# Altium PCB PCB1.PcbDoc
Units mil, origin at the board's own origin, x right, y up, seen from the top; angles counter-clockwise.
Board outline 2705 x 3180 mil, 2 copper layers (Top Layer, Bottom Layer); 7 components, 75 nets, 138 pads, 8 vias.
Unrouted connection lines stored in the file: 10.
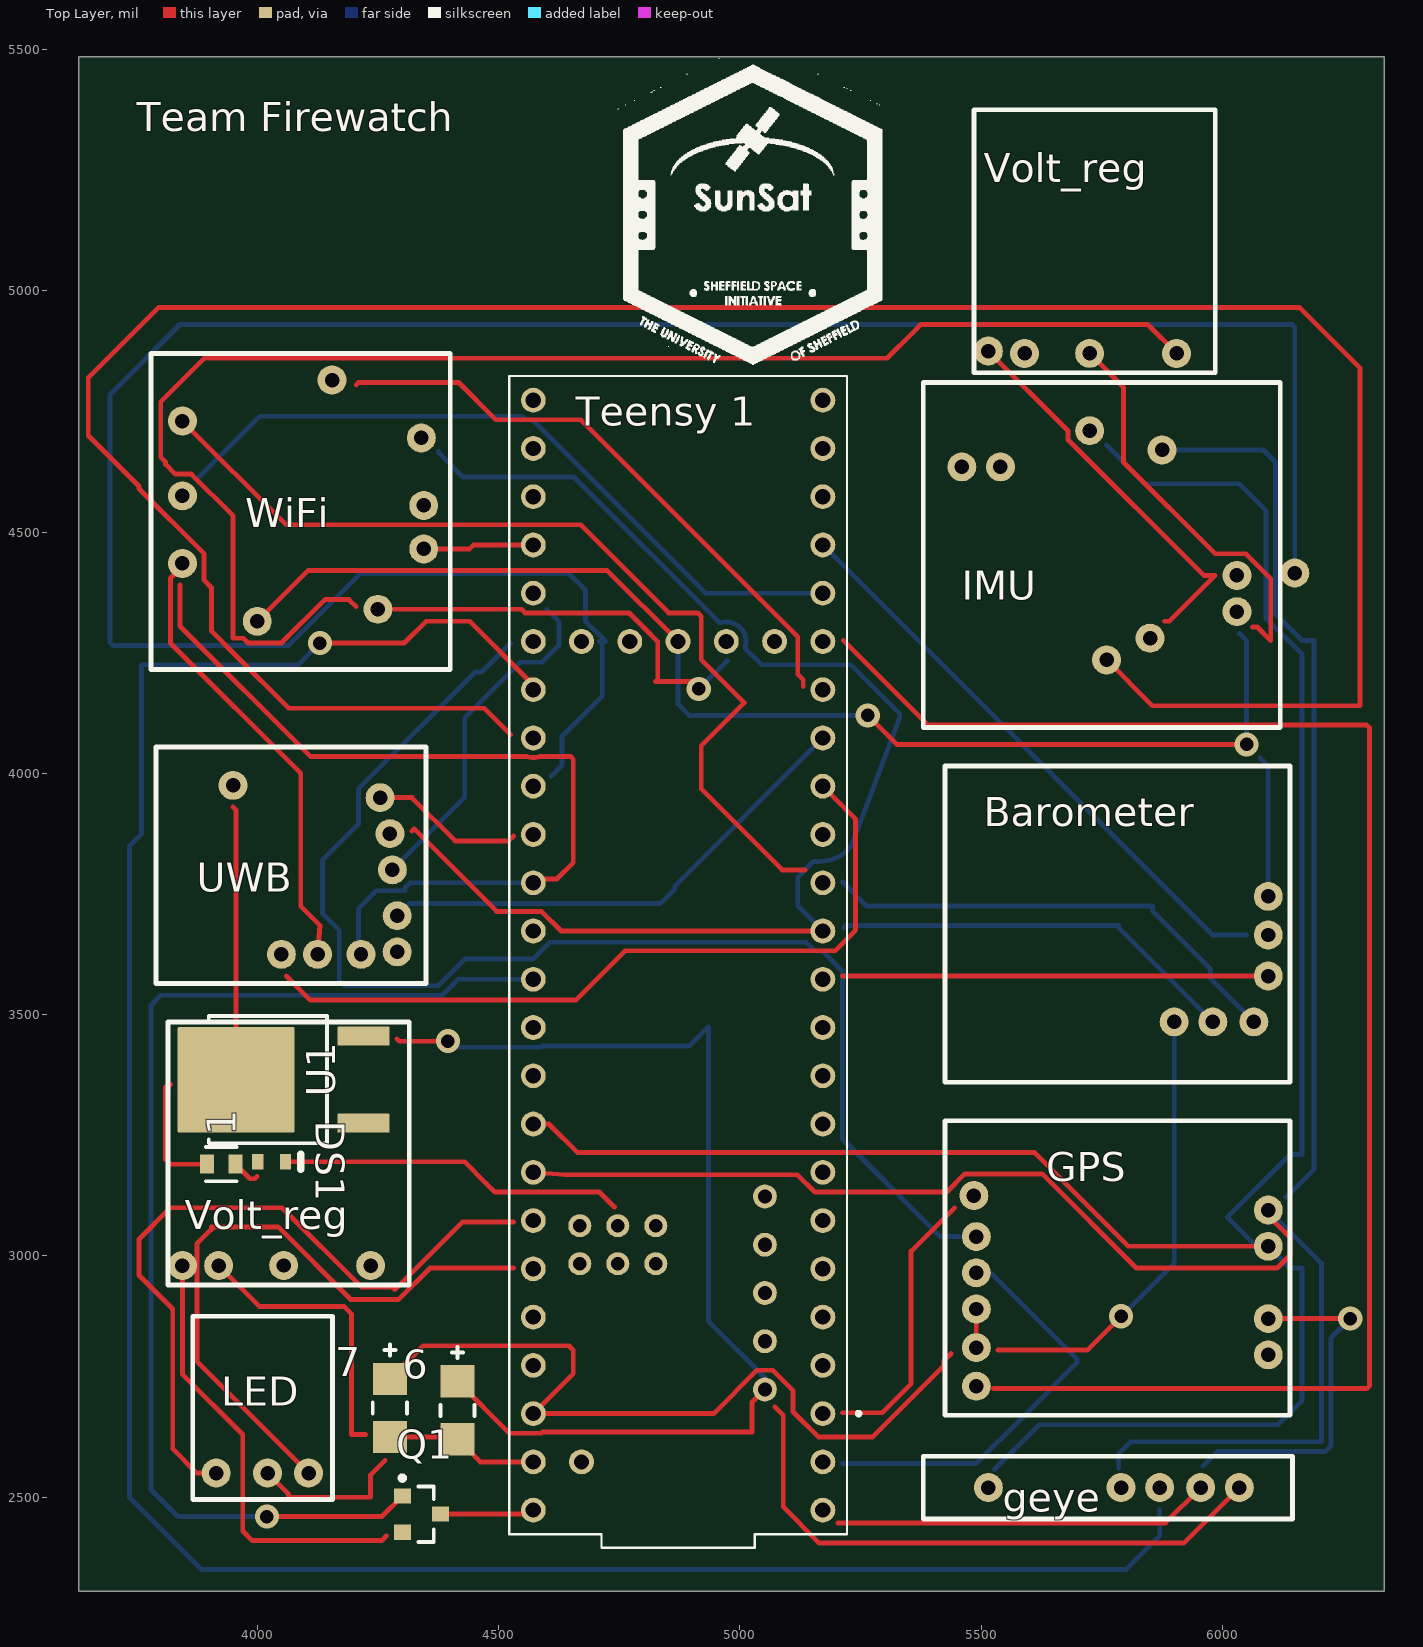
[diagram p0: Top Layer view]
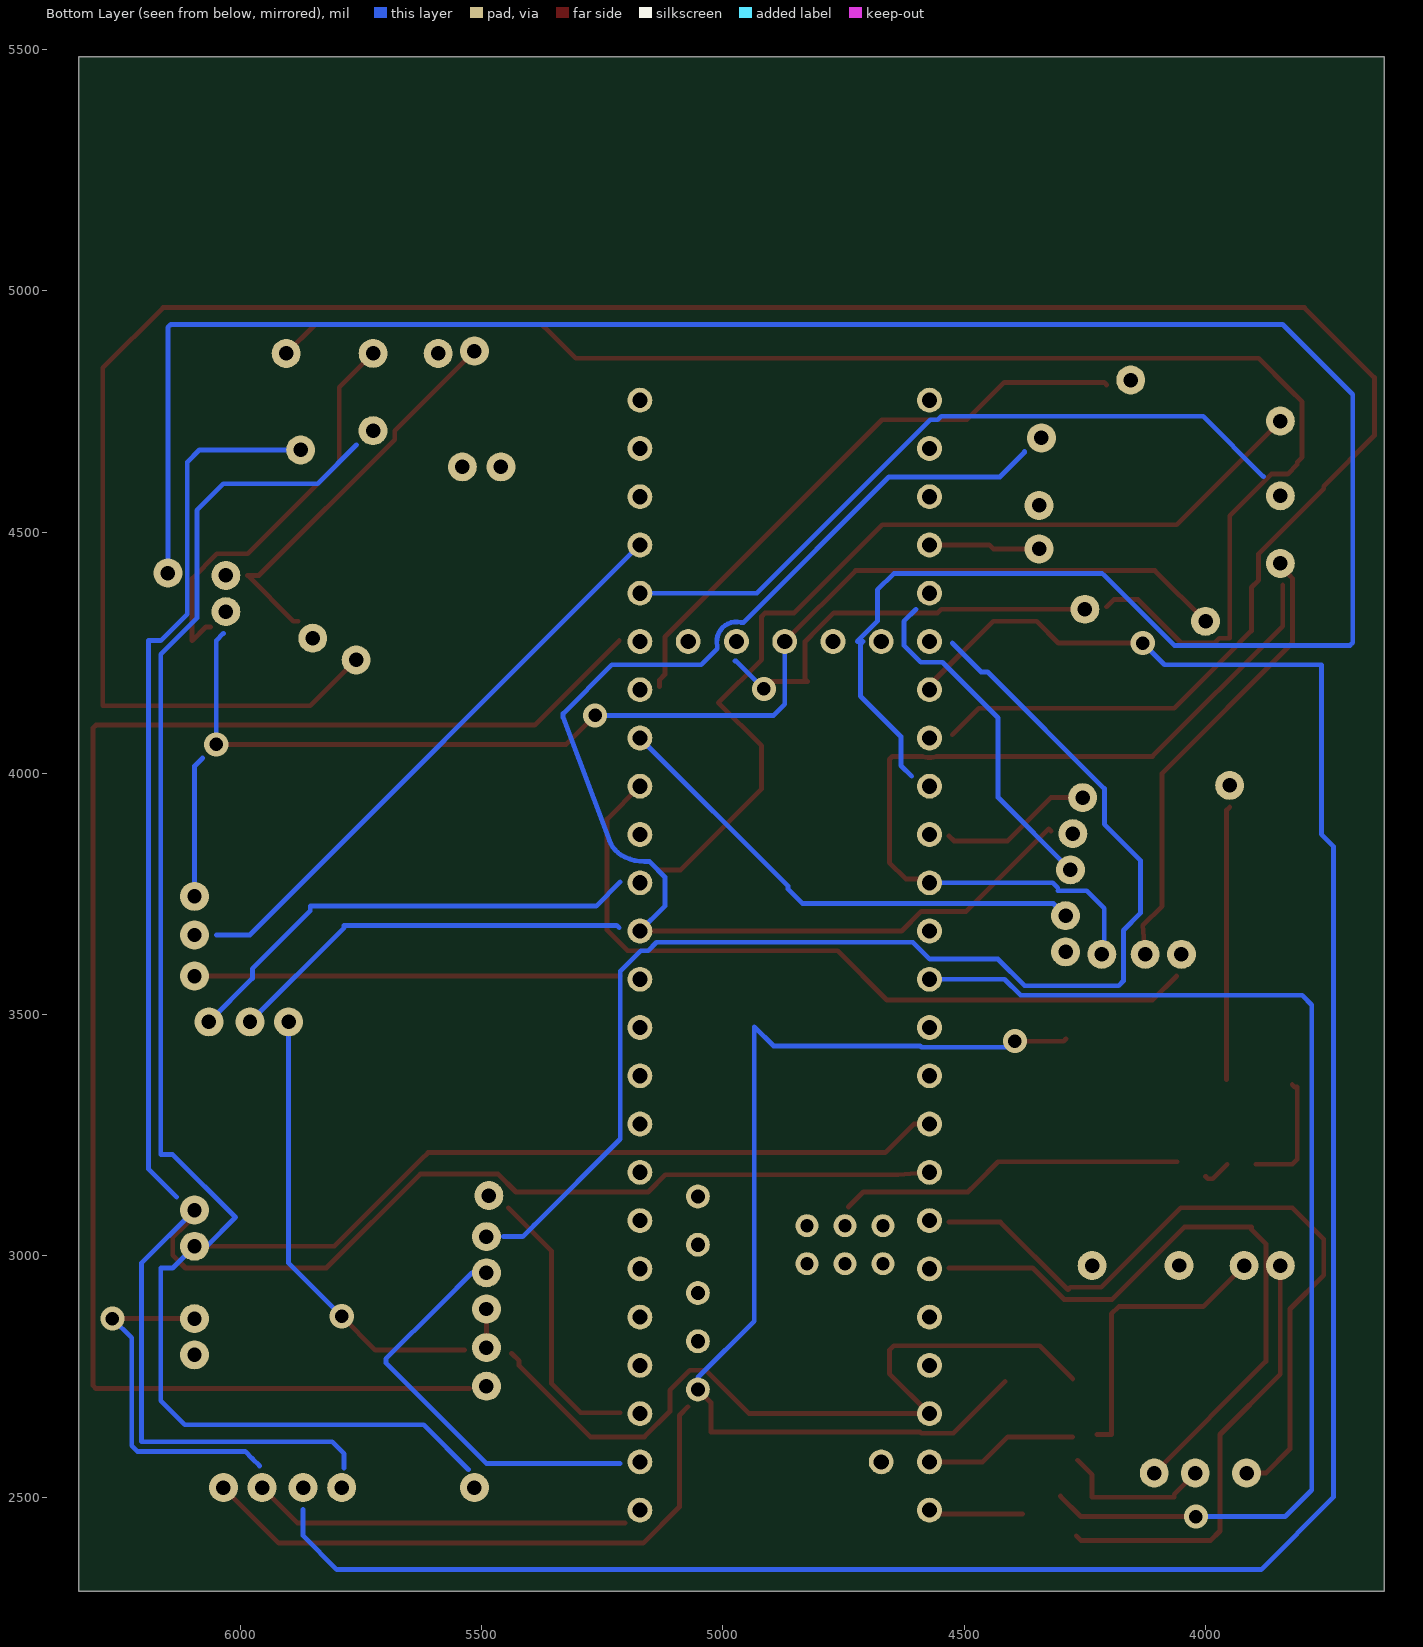
[diagram p1: Bottom Layer view, seen from below]
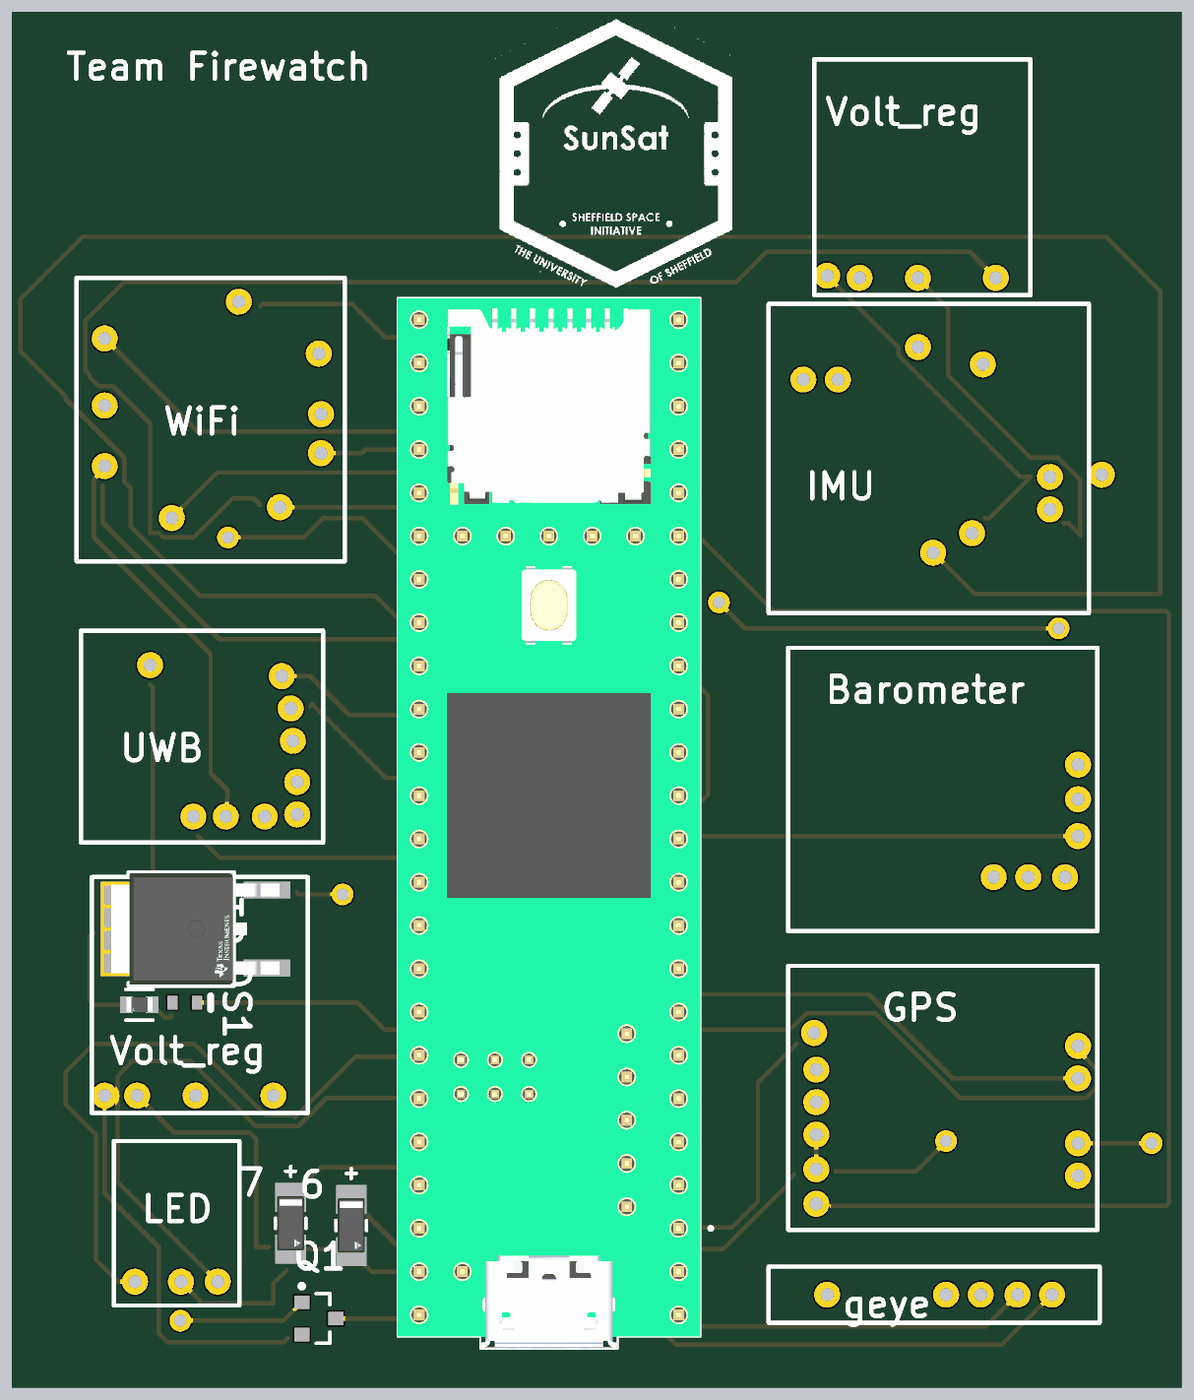
[diagram p2: 3D render of the assembled board from above, using the file's embedded part models]

## Layer stack, top to bottom
Top Solder: solder mask 0.4, Solder Resist, Dk 3.5
Top Layer: signal copper 1.4
Dielectric 1: dielectric 12.6, FR-4, Dk 4.8
Bottom Layer: signal copper 1.4
Bottom Solder: solder mask 0.4, Solder Resist, Dk 3.5

## Board outline
3630,2305 6335,2305 6335,5485 3630,5485

## Design rules (kind name [scope] priority, off if disabled: settings)
Clearance [All] p1: gap=10 ignorepadtopadclearanceinfootprint=FALSE
PolygonConnect [All] p1: connectstyle=Relief reliefconductorwidth=10 reliefentries=4 polygonreliefangle="90 Angle" airgapwidth=10
RoutingVias [All] p1: holewidth=28 width=50 viastyle="Through Hole" minholewidth=28 minwidth=50 maxholewidth=28 maxwidth=50
SolderMaskExpansion [All] p1: expansion=4 istentingtop=FALSE
SupplyNets "Schematic Supply Nets_10" [InNet('+5')] p1: voltage=0.000
SupplyNets "Schematic Supply Nets_9" [InNet('VDD')] p2: voltage=0.000
SupplyNets "Schematic Supply Nets_8" [InNet('VCC 3.3V')] p3: voltage=0.000
SupplyNets "Schematic Supply Nets_7" [InNet('GND')] p4: voltage=0.000
SupplyNets "Schematic Supply Nets_6" [InNet('1.25V')] p5: voltage=0.000
SupplyNets "Schematic Supply Nets_5" [InNet('3.3V')] p6: voltage=0.000
SupplyNets "Schematic Supply Nets_4" [InNet('AVDD 1.8V')] p7: voltage=0.000
SupplyNets "Schematic Supply Nets_3" [InNet('VDDIO 1.8V')] p8: voltage=0.000
SupplyNets "Schematic Supply Nets_2" [InNet('VCC')] p9: voltage=0.000
SupplyNets "Schematic Supply Nets_1" [InNet('antenna')] p10: voltage=0.000
SupplyNets "Schematic Supply Nets" [InNet('+1.25')] p11: voltage=0.000
Width [All] p1: maxlimit=10 minlimit=10 preferedwidth=10
30 further rules are at their usual default settings.

## Classes and differential pairs
component class ALL: 6 7 Q1 "Teensy 1"

## Components (designator, comment, footprint, x,y, rotation, side; value= is the part's Value field where it differs from the comment)
1 "CRCW0603220RFKEA" FP-CRCW0603-e3-MFG 3925.47,3190 r180 top
6 "293D105X0016A2TE3" FP-293DA-MFG 4415,2680 r90 top
7 "293D105X0016A2TE3" FP-293DA-MFG 4275,2685 r90 top
DS1 "TLMS1000-GS08" VISH-TLMS1000_V 4030,3195 r0 top
Q1 "MMBTA42LT1G" ONSC-SOT-23-3-318-08_V 4340,2465 r0 top
"Teensy 1" "Teensy 4.1" MODULE_DEV-16771 4872.01,3623.23 r90 top
U1 "LM317MKVURG3" FP-KVU0003A-MFG 4022.17,3365.16 r90 top

## Footprints (in the part's own frame and the unit in brackets; to place one, negate y for a bottom-side part, rotate by r counter-clockwise, add the part's x,y. Pads: shape width x height; smd on the part's side, far side on the other; paste and mask are expansions set on the pad)
FP-293DA-MFG [mm]
  rect 1.7x1.8 smd paste+0 mask+0: 1(-1.525,0) 2(1.525,0)
  silkscreen extent -0.3,-0.9 3.35,0.9, body extent -2.47,-1 2.47,1, height 0.25
FP-CRCW0603-e3-MFG [mm]
  rect 0.75x1 smd paste+0 mask+0: 1(-0.75,0) 2(0.75,0)
  silkscreen extent -0.8,-0.9 0.8,0.9, body extent -1.22,-0.6 1.22,0.6, height 0.25
FP-KVU0003A-MFG [mm]
  rrect10% 1x2.75 smd paste+0 mask+0: 1(-2.29,-5.025) 3(2.29,-5.025)
  rrect2% 5.55x6.15 smd paste-1000 mask+0: 4(0,1.675)
  silkscreen extent -3.35,-3.11 3.35,3.11, body extent -3.45,-6.5 3.45,4.85, height 0.25
MODULE_DEV-16771 [mm]
  round 1.308 hole 0.8: 0(-26.67,-7.62) 1(-24.13,-7.62) 2(-21.59,-7.62) 3(-19.05,-7.62) 3.3V_1(6.35,-7.62) 3.3V_2(-24.13,7.62) 3.3V_3(16.51,-2.54) 4(-16.51,-7.62) 5(-13.97,-7.62) 6(-11.43,-7.62) 7(-8.89,-7.62) 8(-6.35,-7.62) 9(-3.81,-7.62) 10(-1.27,-7.62) 11(1.27,-7.62) 12(3.81,-7.62) 13(3.81,7.62) 14(1.27,7.62) 15(-1.27,7.62) 16(-3.81,7.62) 17(-6.35,7.62) 18(-8.89,7.62) 19(-11.43,7.62) 20(-13.97,7.62) 21(-16.51,7.62) 22(-19.05,7.62) 23(-21.59,7.62) 24(8.89,-7.62) 25(11.43,-7.62) 26(13.97,-7.62) 27(16.51,-7.62) 28(19.05,-7.62) 29(21.59,-7.62) 30(24.13,-7.62) 31(26.67,-7.62) 32(29.21,-7.62) 33(29.21,7.62) 34(26.67,7.62) 35(24.13,7.62) 36(21.59,7.62) 37(19.05,7.62) 38(16.51,7.62) 39(13.97,7.62) 40(11.43,7.62) 41(8.89,7.62) GND1(-29.21,-7.62) GND2(6.35,7.62) GND3(-26.67,7.62) GND4(16.51,0) ON/OFF(16.51,5.08) PROGRAM(16.51,2.54) VBAT(16.51,-5.08) VIN(-29.21,7.62) VUSB(-26.67,5.08)
  round 1.258 hole 0.75: 5V(-22.86,-4.57) D+(-17.78,-4.57) D-(-20.32,-4.57) USB_GND1(-15.24,-4.57) USB_GND2(-12.7,-4.57)
  round 1.208 hole 0.7: GND5(-14.24,3.17) LED(-16.24,3.17) R+(-16.24,5.17) R-(-14.24,5.17) T+(-14.24,1.17) T-(-16.24,1.17)
  silkscreen extent -31.18,-9.6 30.48,8.89, body extent -31.18,-8.89 30.48,8.89, height 7.15
ONSC-SOT-23-3-318-08_V [mm] "SOT23, 3-Leads, Body 2.92x1.3mm, Pitch 0.95mm"
  rect 0.9x0.8 smd: 1(-1,0.95) 2(-1,-0.95) 3(1,0)
  silkscreen extent -1.12,-1.46 0.65,2.02, body extent -0.65,-1.46 0.65,1.46, height 1.11
VISH-TLMS1000_V [mm] "SMD, 2-Leads, Body 0.8x1.6mm"
  rect 0.6x0.8 smd: 1(-0.725,0) 2(0.725,0)
  silkscreen extent 1.52,-0.4 1.52,0.4, body extent -0.8,-0.4 0.8,0.4, height 0.65

## Part data
1: library part CMP-2000-03085-2, "RES Thick Film, 220Ω, 1%, 0.1W, 100ppm/°C, 0603", Case Code (Imperial)=0603, Case Code (Metric)=1608, Max Operating Temperature=155°C, Max Power Dissipation=100mW, Min Operating Temperature=-55°C, Package Quantity=10, Resistance=220R, Temperature Coefficient=100ppm/°C, Tolerance=1%, Voltage Rating=75V, Case/Package=0603, Composition="Thick Film", Contact Plating=Tin, Depth=0.85mm, Features="Automotive AEC-Q200", Height=0.45mm, Lead Free="Lead Free", Length=1.55mm, Military Standard=Not, Number of Terminations=2, Packaging="Tape and Reel", Power Rating=100mW, Radiation Hardening=No, Termination=SMD/SMT, Voltage Rating (DC)=75V, Weight=7.1E-05oz, Width=0.033inch
6 7: library part CMP-00030-40940187-1, "293D105X0016A2TE3 Surface Mount Tantalum Capacitor, 1 uF, 16 V, ± 20%, -55 °C, 125 °C, 1206 [3216-18 Metric]", Capacitance=1µF, Case Code (Imperial)=1206, Case Code (Metric)=3216, Dielectric Material=Tantalum, ESR (Equivalent Series Resistance)=9.3Ω, Leakage Current=500nA, Max Operating Temperature=125°C, Min Operating Temperature=-55°C, Ripple Current=90mA, Tolerance=20%, Voltage Rating=16V, Case/Package=1206, Depth=1.6mm, Dissipation Factor=4%, Features="General Purpose", Height=1.8mm, Height - Seated (Max)=1.8034mm, Lead Free="Lead Free", Length=3.2mm, Mount="PCB, Surface Mount", NexarPartId=40940187, Number of Pins=2, Packaging="Tape and Reel", Polarity=Polar, Radiation Hardening=No, REACH SVHC=Unknown, RoHS=Compliant, Schedule B="8532210050, 8532210050", Termination=SMD/SMT, Voltage Rating (DC)=16V, Width=1.6002mm
DS1: library part CMP-2000-07254-1, "Low Current LED, 40 mW, 1.8 V, -40 to 100 degC, 2-Pin SMD (0603), RoHS, Tape and Reel", Forward Current If=2mA, Forward Voltage=1.8V, LED Colour=Red, Manufacturer=Vishay, Package Description="2-Pin Surface Mount Device, Body 1.6 x 0.8 mm", Package Reference=TLMS1000, Automotive Qualification Standard=AEC-Q100, Bulb Size=1.6mmx0.8mm, Datasheet URL=https://datasheet.ciiva.com/5798/1698881-5798337.pdf, Datasheet Version="Rev. 1.7, 02/2011", LED Mounting=SMD, Lens Shape=Rectangular, Luminous Intensity=4mcd, Manufacturer URL=http://www.vishay.com/, Mounting Technology=SurfaceMount, MSL=MSL2-1year, Packaging=CutTape, Product Range=-, SVHC=ToBeAdvised, Viewing Angle=80°, Wavelength Typ=636nm
Q1: library part CMP-1048-00662-1, "High Voltage Transistor, NPN Silicon, 3-Pin SOT-23, Pb-Free, Tape and Reel", Manufacturer="On Semiconductor", ComponentLink1Description="Manufacturer URL", ComponentLink1URL=http://www.onsemi.com/, ComponentLink2Description=Datasheet, ComponentLink2URL=http://www.onsemi.cn/pub_link/Collateral/MMBTA42LT1-D.PDF, ComponentLink3Description="Package Specification", ComponentLink3URL=http://www.onsemi.cn/pub_link/Collateral/318-08.PDF, DatasheetVersion="Rev. 12", fT Min (MHz)=50, IC Continuous (A)=0.5, Mounting Technology="Surface Mount", PackageDescription="3-Pin Small Outline Transistor, Body 2.92 x 1.3 mm, Pitch 0.95 mm", PackageReference=SOT-23-3-318-08, PackageVersion="Rev. AP, 11/2009", Packing="Tape and Reel", PartNumber=MMBTA42LT1G, Polarity=NPN, RoHS=TRUE
"Teensy 1": library part CMP-003-000000-1, "RT1062 Teensy 4.1 series ARMÂ® CortexÂ®-M7 MPU Embedded Evaluation Board", Package=None, Availability="In Stock", Check_prices=https://www.snapeda.com/parts/DEV-16771/SparkFun+Electronics/view-part/?ref=eda, Component Type=Standard, Design Item ID=DEV-16771, MF="SparkFun Electronics", MP=DEV-16771, Pin Count=65, Price=None, Purchase-URL=https://pricing.snapeda.com/search/part/DEV-16771/?ref=eda, SnapEDA_Link=https://www.snapeda.com/parts/DEV-16771/SparkFun+Electronics/view-part/?ref=snap, Source=DEV-16771.SchLib
U1: library part CMP-04917-000136-1, "IC REG LIN POS ADJ 500MA TO252-3", Case/Package=TO-252-3, Dropout Voltage=2V, Max Input Voltage=40V, Max Operating Temperature=125°C, Max Output Current=500mA, Max Output Voltage=37V, Min Input Voltage=4.2V, Min Operating Temperature=-40°C, Min Output Voltage=1.25V, Package Quantity=2500, Power Supply Rejection Ratio (PSRR)=80dB, Quiescent Current=3.5mA, Reference Voltage=1.3V, Contact Plating=Tin, Height=2.39mm, Lead Free="Lead Free", Length=6.7mm, Min Current Limit=500mA, Mount="Surface Mount", Number of Outputs=1, Number of Pins=3, Number of Regulators=1, Output Current=500mA, Output Type=Adjustable, Output Voltage=37V, Packaging="Tape and Reel", Polarity=Positive, Radiation Hardening=No, REACH SVHC="No SVHC", RoHS Compliant=Yes, Weight=0.011598oz, Width=6.22mm

## Free pads (board coordinates)
  round 60 hole 30: 2(6035,2520) 3(5515,2520) 4(5790,2520) 5(5870,2520) 6(5955,2520) 7(5900,3485) 8(6095,3745) 9(6065,3485) 10(6095,3580) 11(6095,3665) 12(5980,3485) 13(6030,4335) 14(5850,4280) 15(6030,4410) 16(5540,4635) 17(5460,4635) 18(5725,4710) 19(5875,4670) 20(3845,4730) 21(4250,4340) 22(3845,4435) 23(4340,4695) 24(4345,4555) 25(4155,4815) 26(4345,4465) 27(3845,4575) 28(4000,4315) 29(3920,2980) 29(5590,4870) 30(4054.84,2980.16) 30(5724.84,4870.16) 31(4235,2980) 31(5905,4870) 32(4106.3,2550) 33(4021.3,2550) 34(3915,2550) 35(4050,3625) 36(4125,3625) 37(4215,3625) 38(4290,3705) 39(4280,3800) 40(4275,3875) 41(4254.63,3949.63) 43(3950,3975) 44(4290,3630) 45(6095,2870) 46(6095,2795) 47(6095,3020) 48(6095,3095) 49(5490,2965) 50(5490,2810) 51(5490,2730) 52(5490,2890) 53(5490,3040) 54(5485,3125) 59(6150,4415) 60(5760,4235) 61(3845,2980) 61(5515,4875)

## Via types
v1: diameter 50, hole 28, Top Layer to Bottom Layer, 8 vias

## Nets (pads, with @x,y where several pads share a name; then routed paths per layer and width w, separated by ;. In a path a pad name is that pad's centre, name@x,y a point inside that pad or via, vN(x,y) a via of type N, cw(c..) or ccw(c..) an arc to the next point about the centre after c; other vN are vias at no path point)
1.25V: 
3.3V: 7.2 "Teensy 1.3.3V_2" | length 1641.7
  Top Layer w10: 7.2 4343.94,2813.98 4646.02,2813.98 4655,2805 4655,2756.22 4572.01,2673.23 4945.69,2673.23 5035.46,2762.99 5068.4,2762.99 5110,2721.39 5110,2677.61 5162.61,2625 5275,2625 5422.48,2772.48 5422.48,2782.48 5437.85,2797.85
+1.25: 
+5: 6.2 "Teensy 1.5V" | length 2225.9
  Top Layer w10: 4289.13,3450 4294.13,3445 v1(4395,3445) ; 6.2 4522.56,2632.48 4588.89,2632.48 4591.41,2635 5025,2635 5025,2696.3 5051.93,2723.23
  Bottom Layer w10: v1(4395,3445) 4407.52,3432.48 4588.89,3432.48 4591.41,3435 4895,3435 4935,3475 4935,2865 5051.93,2748.07 5051.93,2723.23
antenna: 
"AVDD 1.8V": 
GND: 6.1 7.1 "Teensy 1.GND1" "Teensy 1.GND2" "Teensy 1.GND3" "Teensy 1.GND4" "Teensy 1.GND5" "Teensy 1.USB_GND1" "Teensy 1.USB_GND2" pad.28 | length 2873.5
  Top Layer w10: pad.28 4105,4420 4725.24,4420 4872.01,4273.23 ; 7.1 4410,2624.96 6.1 4461.73,2573.23 4572.01,2573.23 ; v1(5265,4120) 5325,4060 v1(6050,4060)
  Bottom Layer w10: 4872.01,4273.23 4872.01,4142.99 4895,4120 v1(5265,4120) ; 6035,4290 6050,4275 v1(6050,4060)
Net1_1: 
Net1_2: Q1.2
Net2_1: 
Net3_1: 
Net5_2: 
Net*1_C1: 
Net*1_C3: "Teensy 1.11" "Teensy 1.18" | length 2701.2
  Top Layer w10: 4320,3880 4325,3885 4496.02,3713.98 4588.89,3713.98 4629.63,3673.23 5172.01,3673.23
  Bottom Layer w10: 4375.29,4667.08 cw(c4340,4695) 4375.09,4666.83 4375.09,4664.91 4426.02,4613.98 4656.02,4613.98 4957.16,4312.84 4961.31,4312.84 4962.43,4312.84 cw(c4972.01,4273.23) 5011.61,4263.65 5011.61,4262.53 5011.61,4258.39 5045,4225 5230,4225 5331.33,4123.67 5331.33,4115.35 5235,3860 cw(c5180.54,3880.42) 5210.97,3830.86 cw(c5162.98,3909.01) 5162.98,3817.3 5152.3,3817.3 5149.57,3814.57 5120,3785 5120,3725.24 5122.93,3722.31 5172.01,3673.23
Net*1_C4: "Teensy 1.37"
Net*1_D1: 
Net*1_D2: "Teensy 1.13" | length 1599.9
  Top Layer w10: 3840,4390.28 3840,4305 4110,4035 4557.9,4035 ccw(c4572.01,4073.23) 4586.11,4035 4649.14,4035 4652.07,4032.07 4655,4029.14 4655,3815 4621.17,3781.17 4579.95,3781.17 4572.01,3773.23
  Bottom Layer w10: 4306.14,3762.5 4316.87,3773.23 4572.01,3773.23
Net*1_D4: 
Net*1_E2: "Teensy 1.24" | length 1587.2
  Top Layer w10: 4060,3580 4110,3530 4660,3530 4762.48,3632.48 5197.48,3632.48 5240,3675 5240,3905.24 5172.01,3973.23
Net*_1: 
Net*_7: 
Net*_8: 
Net*_16: 
Net*_17: 
Net*_19: "Teensy 1.26"
Net*_20: 
Net*_21: 
Net*_22: "Teensy 1.8"
Net*_23: "Teensy 1.7"
Net*_27: "Teensy 1.28" | length 1495.7
  Bottom Layer w10: 3880,4615 4005,4740 4547.61,4740 4555.13,4732.48 4570.38,4732.48 4929.63,4373.23 5172.01,4373.23
Net*_32: "Teensy 1.36" pad.26 | length 230.4
  Top Layer w10: pad.26 4440,4465 4448.23,4473.23 4572.01,4473.23
Net*_36: "Teensy 1.12"
NetB1_3: "Teensy 1.19" | length 65.1
  Top Layer w10: 4572.01,3173.23 4636.96,3168.36
NetB1_4: "Teensy 1.1" "Teensy 1.39" | length 4935.2
  Top Layer w10: v1@4125,4270 v1(4130,4270) 4305,4270 4350,4315 4440,4315 4572.01,4182.99 4572.01,4173.23
  Bottom Layer w10: v1(4130,4270) 4085,4225 3760,4225 3760,3873.64 3735,3848.64 3735,2500 3885,2350 5800,2350 5870,2420 5870,2475
NetB1_10: 
NetB2_5: 
NetB2_10: 
NetB3_2: 
NetB3_3: 
NetB3_4: "Teensy 1.40"
NetB3_9: 
NetB3_17: "Teensy 1.41"
NetB4_3: "Teensy 1.0" "Teensy 1.38"
NetB4_9: "Teensy 1.27" | length 1242.9
  Top Layer w10: 4205,4805 4210,4810 4417,4810 4494.52,4732.48 4670.38,4732.48 5120,4282.86 5120,4205 5131.26,4193.74 5131.26,4180
NetB5_2: 
NetB5_5: 
NetB5_13: 
NetB5_14: 
NetB6_6: "Teensy 1.10"
NetB6_7: "Teensy 1.29" | length 1212.8
  Bottom Layer w10: 5172.01,4473.23 5980.24,3665 6050,3665
NetB6_10: 
NetC2_1: 
NetC3_2: 
"NetC 2_2": 
"NetC 4_2": 
NetDS2_1: 
NetDS2_2: "Teensy 1.21"
NetDS2_3: 
NetQ1_1: "Teensy 1.15" Q1.1 | length 2380
  Top Layer w10: v1(4020,2460) 4258.23,2460 Q1.1
  Bottom Layer w10: v1(4020,2460) 3835,2460 3780,2515 3780,3520 3800,3540 4383.28,3540 4416.51,3573.23 4572.01,3573.23
NetQ1_3: "Teensy 1.VIN" Q1.3 | length 196
  Top Layer w10: Q1.3 4563.78,2465 4572.01,2473.23
NetR2_1: 
NetR3_1: 
NetR5_1: 
NetR6_2: 
"NetTeensy 1_16": "Teensy 1.16"
"NetTeensy 1_17": "Teensy 1.17"
"NetTeensy 1_20": "Teensy 1.20"
"NetTeensy 1_D+": "Teensy 1.D+"
"NetTeensy 1_D-": "Teensy 1.D-"
"NetTeensy 1_VUSB": "Teensy 1.VUSB"
NetU1_3: 
VCC: 
"VCC 3.3V": 
VDD: 
"VDDIO 1.8V": 
pads on no net: 1.1 1.2 "Teensy 1.2" "Teensy 1.3" "Teensy 1.3.3V_1" "Teensy 1.3.3V_3" "Teensy 1.4" "Teensy 1.5" "Teensy 1.6" "Teensy 1.9" "Teensy 1.14" "Teensy 1.22" "Teensy 1.23" "Teensy 1.25" "Teensy 1.30" "Teensy 1.31" "Teensy 1.32" "Teensy 1.33" "Teensy 1.34" "Teensy 1.35" "Teensy 1.LED" "Teensy 1.ON/OFF" "Teensy 1.PROGRAM" "Teensy 1.R+" "Teensy 1.R-" "Teensy 1.T+" "Teensy 1.T-" "Teensy 1.VBAT" DS1.1 DS1.2 U1.1 U1.3 U1.4
copper on no net: | length 51022.6
  Top Layer w10: 3820.16,3355 3815.16,3350 3810,3350 3810,3200 3820,3190 3895.94,3190 ; 3826.64,4410 3825.86,4410 3820,4404.14 3820,4270 4090,4000 4090,3725 4130,3685 4125,3625 ; 3845,2980 3845,2755 3970,2630 3970,2430 3990,2410 4257.91,2410 4267.91,2420 ; 3845,4730 4060,4515 4670,4515 4852.52,4332.48 4912.52,4332.48 4920,4325 4920,4235.65 5009.35,4146.3 4920,4056.96 4920,3967.61 5087.61,3800 5135,3800 ; 3915,2550 3875,2550 3825,2600 3825,2890 3755,2960 3755,3035 3820,3100 4051.36,3100 4216.36,2935 4280,2935 4285,2930 4425,3070 4531.26,3070 ; 3920,2980 4005,2895 4180,2895 4195,2880 4195,2630 4224.57,2630 ; 3950,3930 3956.22,3923.78 3956.22,3365.16 ; 3955,3190 3985,3160 3995,3160 3999.25,3164.25 4000,3164.25 ; 4021.3,2550 4065,2506.3 4065,2500 4235,2500 4235,2546.5 4265,2576.5 ; 4058.54,3195 4270,3195 4430,3195 4475,3150 4492.52,3132.48 4708.9,3132.48 4740,3101.38 ; 4106.3,2550 3875,2781.3 3875,3025 3905,3055 3905,3060 4043.28,3060 4193.28,2910 4293.28,2910 4358.28,2975 4531.26,2975 ; 4195,3640 4215,3625 ; 4205,4345 4190,4360 4140,4360 4050,4270 3981.36,4270 3971.36,4280 3950,4280 3950,4533.64 3863.64,4620 3830,4620 3810,4640 3810,4645 3800,4655 3800,4770 3825,4795 3890,4860 5080,4860 5305,4860 5360,4915 5375,4930 5730,4930 5845,4930 5905,4870 ; 4250,4340 4547.61,4340 4555.13,4332.48 4770.38,4332.48 4801.43,4301.43 4830,4272.86 4830,4195 4825,4190 4900,4190 v1(4915,4175) ; 4254.63,3949.63 4320.37,3949.63 4410,3860 4521.26,3860 4531.26,3870 ; 4525,4080 4470,4135 4065,4135 3955,4245 3905,4295 3905,4385 3890,4400 3890,4455 3755,4590 3755,4595 3650,4700 3650,4820 3795,4965 6160,4965 6285,4840 6285,4140 5855,4140 5760,4235 ; 4572.01,3273.23 4604.53,3273.23 4663.78,3213.98 5611.02,3213.98 5625,3200 5805,3020 6095,3020 ; 4636.96,3168.36 5119.25,3168.36 5155.13,3132.48 5428.84,3132.48 5466.36,3170 5626.72,3170 5628.36,3168.36 5821.72,2975 6113.64,2975 6140,3001.36 6140,3038.64 6113.64,3065 6095,3083.64 6095,3095 ; 5072.5,2687.5 5090,2670 5090,2485 5090,2480 5165,2405 5920,2405 6035,2520 ; 5203.2,2446.8 5881.8,2446.8 5955,2520 ; 5212.76,2675 5295,2675 5355,2735 5355,3010 5445,3100 ; 5212.76,3580 6095,3580 ; 5215,4275 5390,4100 6299.14,4100 6305,4094.14 6305,2730.86 6299.14,2725 5525,2725 ; 5490,2810 5490,2845 ; 5490,2835 5490,2890 ; 5515,4875 5680,4710 5680,4691.36 5961.36,4410 5985,4410 5890,4315 5880,4315 ; 5535,2805 5720,2805 v1(5790,2875) ; 5724.84,4870.16 5795,4800 5795,4645 5985,4455 6048.64,4455 6100,4403.64 6100,4275 6071.82,4303.18 6061.82,4303.18 ; 6095,2870 v1(6265,2870)
  Bottom Layer w10: 4210,3635 4210,3720 4246.56,3756.56 4306.14,3756.56 ; 4280,3800 4430,3950 4430,4115 4545,4230 4590,4230 4625,4265 4625,4315 4600,4340 ; 4290,3705 4315,3730 4835,3730 4865,3760 4865,3766.22 5172.01,4073.23 ; 4302.5,3642.5 4302.5,3631.28 4313.1,3620.68 ; 4525,4270 4465,4210 4451.36,4210 4209.63,3968.27 4209.63,3894.63 4135,3820 4135,3710 4170,3675 4170,3648.64 4170,3570 4180,3560 4375,3560 4430,3615 4571.41,3615 4606.41,3650 4630,3650 5137.61,3650 5155.13,3632.48 5170.38,3632.48 5212.76,3590.11 5212.76,3242.24 5391.25,3063.75 5415,3040 5455,3040 ; 4608.93,3993.93 4631.26,4016.26 4631.26,4076.26 4715,4160 4715,4267.37 4709.14,4273.23 4721.77,4273.23 4680,4315 4680,4380 4646.02,4413.98 4213.98,4413.98 4210,4410 4065,4265 3700.86,4265 3695,4270.86 3695,4785 3840,4930 6144.14,4930 6150,4924.14 6150,4415 ; v1(4915,4175) 4972.48,4232.48 4975,4232.48 ; 5212.76,2570 5490,2570 5585,2665 5698.36,2778.36 5698.36,2786.64 5585,2900 5520,2965 5490,2965 ; 5212.76,3775 5262.76,3725 5855,3725 5855,3715 5975,3595 5975,3575 6065,3485 ; 5215,3680 5220,3685 5785,3685 5785,3680 5980,3485 ; 5527.5,2557.5 5620,2650 5885,2650 6115,2650 6140,2675 6165,2700 6165,2975 6140,2975 6095,3020 6070,3020 6010,3080 6140,3210 6165,3210 6165,4246.72 6090,4321.72 6090,4545 6035,4600 5840,4600 5759.32,4680.68 ; 5785,2560 5785,2590 5810,2615 6205,2615 6205,2985 6095,3095 ; v1(5790,2875) 5900,2985 5900,3485 ; 5875,4670 6085,4670 6110,4645 6110,4330 6165,4275 6190,4275 6190,3180 6131.82,3121.82 ; 5960,2565 5975,2580 5990,2595 6213.28,2595 6225,2606.72 6225,2830 v1(6265,2870) ; 6078.28,4031.72 6095,4015 6095,3745

## Silkscreen, mask and mechanical layers (free items; w line width, h text height)
Top Overlay:
  drawing of 113 lines, arcs and shapes, not listed
  text "Team Firewatch" at 3750,5330 h60
  text "Volt_reg" at 5505,5224.99 h60
  text "WiFi" at 3975,4510 h60
  text "IMU" at 5460,4360 h60
  text "Barometer" at 5505,3890 h60
  text "UWB" at 3875,3755 h60
  text "GPS" at 5635,3155 h60
  text "Volt_reg" at 3850,3054.99 h60
  text "LED" at 3925,2690 h60
  text "geye" at 5545,2469.99 h60